# EAGLE board SRC01 (EAGLE 7.6.0)
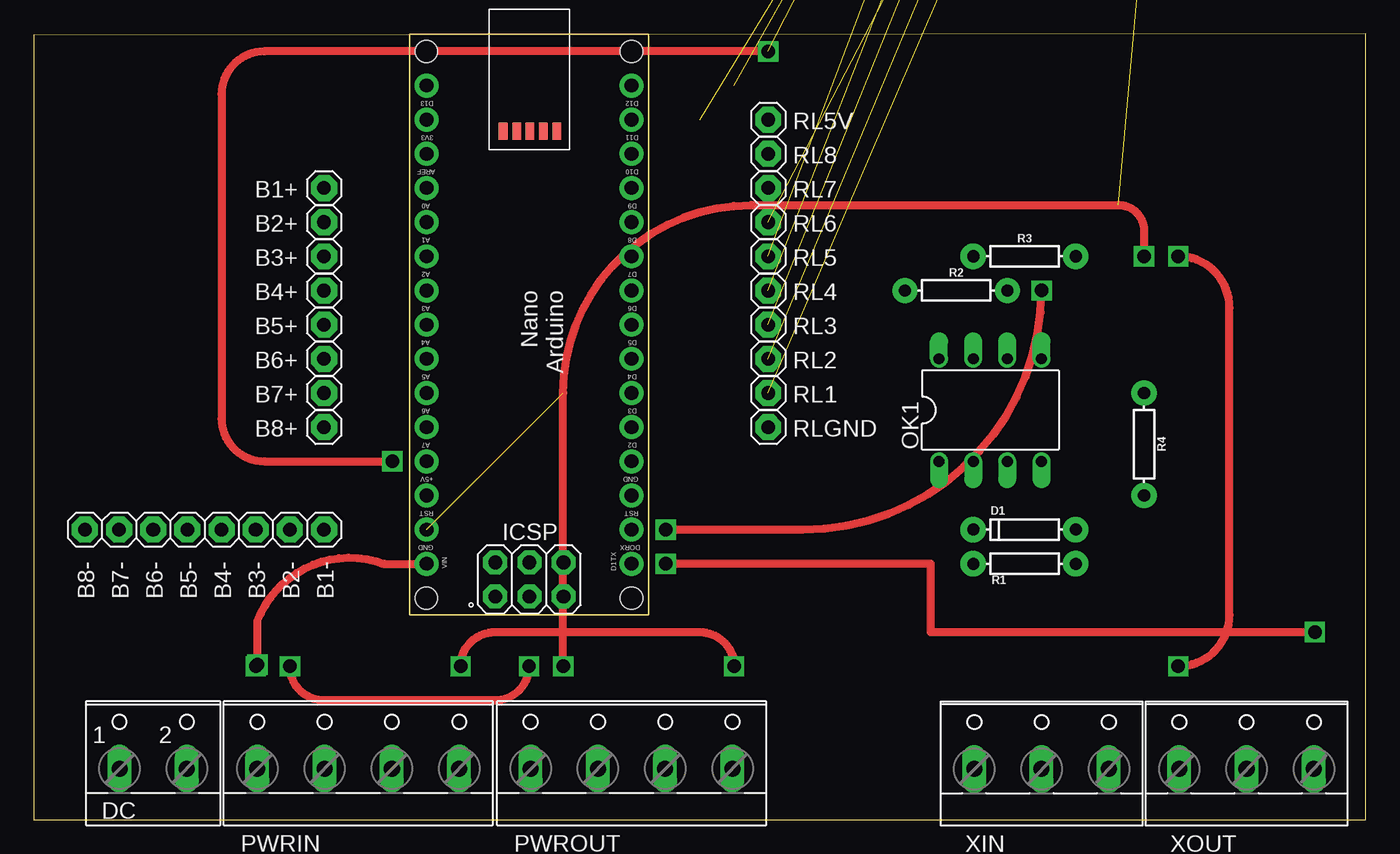
[diagram p0: board, top side]
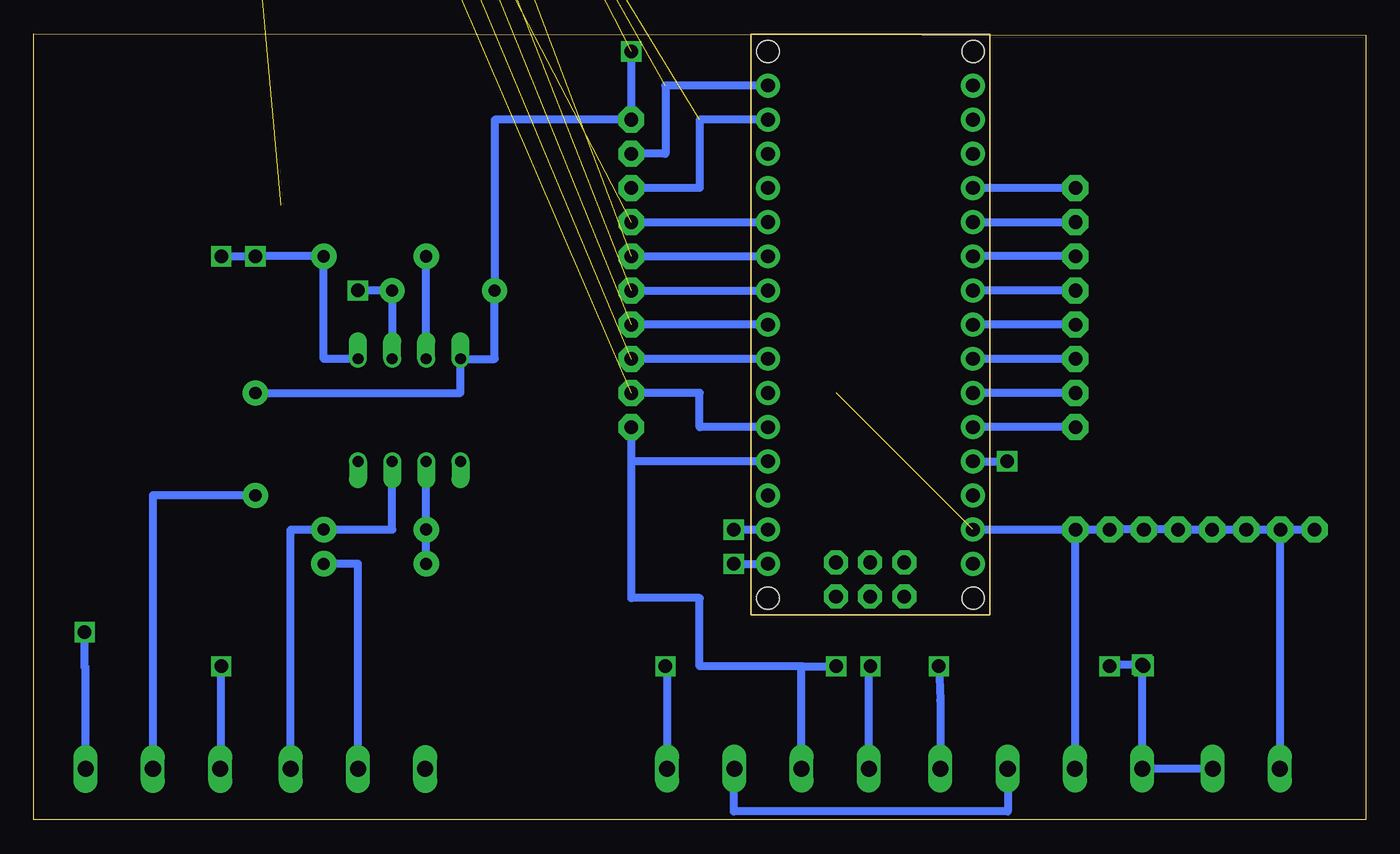
[diagram p1: board, bottom side, seen from below]

Size 99.04 x 58.47 mm. Coordinates in mm from the lower left corner, seen from the top.
Outline: 0,0 99.04,0 99.04,58.47 0,58.34 0,0
Copper layers (1*16): Top 0.035mm / dielectric 1.5mm / Bottom 0.035mm
Design rules "default": minimum track width 10mil, minimum drill 24mil, track to track 8mil, track to pad 8mil, pad to pad 8mil, via to via 8mil, smd to smd 8mil, copper to edge 40mil, drill to drill 8mil, minimum pad ring 10mil, minimum via ring 8mil, stop-mask expansion 4mil, vias tented up to drill 0mil, thermal gap 10mil
Net classes: 0 default: width 0.508 mm, drill 0.508 mm, clearance 0.406 mm; 1 GND: width 1.016 mm, drill 0.508 mm, clearance 0.508 mm; 2 5VM: width 1.016 mm, drill 0.508 mm, clearance 0.508 mm; 3 12VL: width 0.61 mm, drill 0.508 mm, clearance 0.508 mm; 4 12VA: width 0.508 mm, drill 0.508 mm, clearance 0.508 mm; 5 AR5V: width 0.406 mm, drill 0.508 mm, clearance 0.508 mm; 6 PTX: width 0.406 mm, drill 0.508 mm, clearance 0.508 mm; 7 PRX: width 0.406 mm, drill 0.508 mm, clearance 0.508 mm
Holes 3 mm at 118.11,16.51 118.11,24.13

## Footprints (pad centres in the part's own frame; a part is rotated, then mirrored left to right if it is on the bottom)
1X01 = drill 1.016 pad 1.93 octagon: 1 0,0
DIODE-1N4148 = drill 0.9 pad 1.88: A -3.81,0; C 3.81,0
W237-102 = drill 1.194 long: 1 -2.5,-1.27; 2 2.5,-1.27
DIL08 = drill 0.813 offset: 1 -3.81,-3.81; 2 -1.27,-3.81; 3 1.27,-3.81; 4 3.81,-3.81; 5 3.81,3.81; 6 1.27,3.81; 7 -1.27,3.81; 8 -3.81,3.81
ARDUINO_NANO = drill 1.016 pad 1.778: 3V3 6.35,1.27; 5V 31.75,1.27; A0 11.43,1.27; A1 13.97,1.27; A2 16.51,1.27; A3 19.05,1.27; A4 21.59,1.27; A5 24.13,1.27; A6 26.67,1.27; A7 29.21,1.27; D2 29.21,16.51; D3 26.67,16.51; D4 24.13,16.51; D5 21.59,16.51; D6 19.05,16.51; D7 16.51,16.51; D8 13.97,16.51; D9 11.43,16.51; D10 8.89,16.51; D11 6.35,16.51; D12 3.81,16.51; D13 3.81,1.27; GND 31.75,16.51; GND. 36.83,1.27; REF 8.89,1.27; RST 34.29,16.51; RST. 34.29,1.27; RX1 36.83,16.51; TX1 39.37,16.51; VIN 39.37,1.27 | drill 1.016 pad 1.778 octagon: 5V. 39.268,6.375; GND_ 39.268,11.455; MISO 41.808,6.375; MOSI 39.268,8.915; RESET.. 41.808,11.455; SCK 41.808,8.915 | smd 1.27 x 0.635: <USB>+V 7.214,10.947; <USB>D+ 7.214,9.957; <USB>D- 7.214,8.941; <USB>GND 7.214,6.96; <USB>ID 7.214,7.976 | hole 1.651: 1.27,1.27; 1.27,16.51; 41.91,16.51; 41.91,1.27
W237-4 = drill 1.194 long: 1 -7.5,-1.27; 2 -2.5,-1.27; 3 2.5,-1.27; 4 7.5,-1.27
AXIAL-0.3 = drill 0.9 pad 1.88: P$1 -3.81,0; P$2 3.81,0
HDF15V = drill 0.9 octagon: 1 4.329,1.98 | drill 0.9: 2 2.043,1.98; 3 -0.243,1.98; 4 -2.529,1.98; 5 -4.815,1.98; 6 5.472,0; 7 3.186,0; 8 0.9,0; 9 -1.386,0; 10 -3.672,0; 11 4.329,-1.98; 12 2.043,-1.98; 13 -0.243,-1.98; 14 -2.529,-1.98; 15 -4.815,-1.98 | hole 3: -12.5,0; 12.5,0
W237-103 = drill 1.194 long: 1 -5,-1.29; 2 0,-1.29; 3 5,-1.29

## Placement (x,y rotation side)
B1+  [1X01]  21.59,46.99 0 top
B1-  [1X01]  21.59,21.59 0 top
B2+  [1X01]  21.59,44.45 0 top
B2-  [1X01]  19.05,21.59 0 top
B3+  [1X01]  21.59,41.91 0 top
B3-  [1X01]  16.51,21.59 0 top
B4+  [1X01]  21.59,39.37 0 top
B4-  [1X01]  13.97,21.59 0 top
B5+  [1X01]  21.59,36.83 0 top
B5-  [1X01]  11.43,21.59 0 top
B6+  [1X01]  21.59,34.29 0 top
B6-  [1X01]  8.89,21.59 0 top
B7+  [1X01]  21.59,31.75 0 top
B7-  [1X01]  6.35,21.59 0 top
B8+  [1X01]  21.59,29.21 0 top
B8-  [1X01]  3.81,21.59 0 top
D1  200mA/100V/1V  [DIODE-1N4148]  73.66,21.59 180 top
DC  [W237-102]  8.89,5.08 0 top
OK1  6N138  [DIL08]  71.12,30.48 0 top
PCB1  ARDUINO_NANO  [ARDUINO_NANO]  27.94,58.42 270 top
PWRIN  [W237-4]  24.13,5.08 0 top
PWROUT  [W237-4]  44.45,5.08 0 top
R1  220  [AXIAL-0.3]  73.66,19.05 0 top
R2  220  [AXIAL-0.3]  68.58,39.37 0 top
R3  4K7  [AXIAL-0.3]  73.66,41.91 0 top
R4  220  [AXIAL-0.3]  82.55,27.94 270 top
RL1  [1X01]  54.61,31.75 0 top
RL2  [1X01]  54.61,34.29 0 top
RL3  [1X01]  54.61,36.83 0 top
RL4  [1X01]  54.61,39.37 0 top
RL5  [1X01]  54.61,41.91 0 top
RL5V  [1X01]  54.61,52.07 0 top
RL6  [1X01]  54.61,44.45 0 top
RL7  [1X01]  54.61,46.99 0 top
RL8  [1X01]  54.61,49.53 0 top
RLGND  [1X01]  54.61,29.21 0 top
X1  [HDF15V]  92.71,128.27 0 top  (outside the outline)
XIN  [W237-103]  74.93,5.08 0 top
XOUT  [W237-103]  90.17,5.08 0 top

## Library data of the parts
B1+ B1- B2+ B2- B3+ B3- B4+ B4- B5+ B5- B6+ B6- B7+ B7- B8+ B8- RL1-RL5 RL5V RL6-RL8 RLGND X1 = adafruit
D1 = SparkFun-DiscreteSemi; PROD_ID: DIO-08378
DC = con-wago-500; MPN: 237-102; OC_FARNELL: unknown; OC_NEWARK: 70K9898
OK1 = optocoupler; MF: VISHAY/TELEFUNKEN; MPN: 6N138; OC_FARNELL: 9860150; OC_NEWARK: 35K5294
PCB1 = E14_Arduino_revC
PWRIN PWROUT = con-wago-500; OC_FARNELL: unknown; OC_NEWARK: unknown
R1-R4 = SparkFun-Resistors; PROD_ID: RES-08380
XIN XOUT = con-wago-500; MPN: 237-103; OC_FARNELL: unknown; OC_NEWARK: 18M7116

## Nets
5VM [5VM]: PWRIN.4 PWROUT.4
12VA [12VA]: DC.2 PCB1.VIN PWRIN.1 PWROUT.1
12VL [12VL]: PWRIN.3 PWROUT.3
AR5V: OK1.8 PCB1.5V R2.P$1 R4.P$1 RL5V.1 X1.14
B1: B1+.1 PCB1.A0
B2: B2+.1 PCB1.A1
B3: B3+.1 PCB1.A2
B4: B4+.1 PCB1.A3
B5: B5+.1 PCB1.A4
B6: B6+.1 PCB1.A5
B7: B7+.1 PCB1.A6
B8: B8+.1 PCB1.A7
D1: PCB1.D2 RL1.1 X1.1
D2: PCB1.D4 RL2.1 X1.2
D3: PCB1.D5 RL3.1 X1.3
D4: PCB1.D6 RL4.1 X1.4
D5: PCB1.D7 RL5.1 X1.5
D6: PCB1.D8 RL6.1 X1.6
D7: PCB1.D11 RL7.1 X1.7
D8: PCB1.D12 RL8.1 X1.8
GND [GND]: B1-.1 B2-.1 B3-.1 B4-.1 B5-.1 B6-.1 B7-.1 B8-.1 DC.1 OK1.5 PCB1.GND PCB1.GND. PWRIN.2 PWROUT.2 R3.P$2 RLGND.1 X1.15 XOUT.1
N$2: R4.P$2 XOUT.2
N$25: D1.A OK1.3 XIN.3
N$26: D1.C OK1.2 R1.P$1
N$27: R1.P$2 XIN.2
N$29: OK1.7 R3.P$1
PRX: OK1.6 PCB1.RX1 R2.P$2
PTX: PCB1.TX1 XOUT.3

## Tracks (layer width: path | path; a pad name or v marks a point on that pad's centre or on a via)
5VM  (via drill 1)
  Top 0.61: v31.75,11.43 arc-90 34.29,13.97 49.53,13.97 arc-90 v52.07,11.43
  Bottom 0.61: 31.75,3.81 PWRIN.4 31.63,8.89 v31.75,11.43 | v52.07,11.43 51.95,11.43 PWROUT.4
12VA  (via drill 1)
  Top 0.61: PCB1.VIN 26.04,19.05 arc90 16.63,14.72 v16.63,11.55 arc-90 v16.51,11.43 | 36.95,11.55 arc-90 v36.83,11.43 arc-90 34.29,8.89 21.59,8.89 arc-90 v19.05,11.43
  Bottom 0.61: DC.2 PWRIN.1 16.63,11.31 arc90 v16.51,11.43 | PWROUT.1 36.95,11.31 arc90 v36.83,11.43 | v16.63,11.55 19.05,11.55 v19.05,11.43
12VL
  Bottom 0.61: PWRIN.3 26.63,0.64 46.99,0.64 46.99,3.81 PWROUT.3
AR5V  (via drill 1)  (1 unrouted)
  Top 0.61: v54.61,57.15 17.14,57.15 arc90 13.97,53.98 13.97,29.84 arc90 17.14,26.67 v26.67,26.67
  Bottom 0.61: PCB1.5V v26.67,26.67 | v54.61,57.15 RL5V.1 64.77,52.07 R2.P$1 64.77,34.29 OK1.8 67.31,31.75 R4.P$1
B1
  Bottom 0.61: B1+.1 PCB1.A0
B2
  Bottom 0.61: PCB1.A1 B2+.1
B3
  Bottom 0.61: B3+.1 PCB1.A2
B4
  Bottom 0.61: B4+.1 PCB1.A3
B5
  Bottom 0.61: B5+.1 PCB1.A4
B6
  Bottom 0.61: B6+.1 PCB1.A5
B7
  Bottom 0.61: B7+.1 PCB1.A6
B8
  Bottom 0.61: B8+.1 PCB1.A7
D1  (1 unrouted)
  Bottom 0.61: PCB1.D2 49.53,29.21 49.53,31.75 RL1.1
D2  (1 unrouted)
  Bottom 0.61: PCB1.D4 RL2.1
D3  (1 unrouted)
  Bottom 0.61: PCB1.D5 RL3.1
D4  (1 unrouted)
  Bottom 0.61: RL4.1 PCB1.D6
D5  (1 unrouted)
  Bottom 0.61: RL5.1 PCB1.D7
D6  (1 unrouted)
  Bottom 0.61: RL6.1 PCB1.D8
D7  (1 unrouted)
  Bottom 0.61: PCB1.D11 49.53,52.07 49.53,46.99 RL7.1
D8  (1 unrouted)
  Bottom 0.61: PCB1.D12 52.07,54.61 52.07,49.53 RL8.1
GND  (via drill 1)  (2 unrouted)
  Top 0.61: v39.37,11.43 39.37,31.75 arc-90 53.34,45.72 80.64,45.72 arc-90 82.55,43.81 v82.55,41.91 | v85.09,11.43 arc90 88.9,15.24 88.9,38.1 arc90 v85.09,41.91
  Bottom 0.61: PCB1.GND. B1-.1 | B1-.1 B2-.1 B3-.1 B4-.1 B5-.1 B6-.1 B7-.1 | B7-.1 B8-.1 | OK1.5 77.47,34.29 R3.P$2 v82.55,41.91 v85.09,41.91 | DC.1 6.35,3.81 B7-.1 | PCB1.GND 54.61,26.67 | PWRIN.2 21.59,3.81 B1-.1 | 41.95,11.39 arc90 41.91,11.43 v39.37,11.43 | 54.61,26.67 54.61,16.51 49.53,16.51 49.53,11.43 41.95,11.43 41.95,11.39 | 54.61,26.67 RLGND.1 | XOUT.1 85.09,3.79 v85.09,11.43 | PWROUT.2 41.95,11.39
N$2
  Bottom 0.61: R4.P$2 90.17,24.13 XOUT.2
N$25
  Bottom 0.61: OK1.3 72.39,21.59 D1.A 79.93,21.59 XIN.3
N$26
  Bottom 0.61: R1.P$1 D1.C OK1.2
N$27
  Bottom 0.61: XIN.2 74.93,19.05 R1.P$2
N$29
  Bottom 0.61: OK1.7 R3.P$1
PRX  (via drill 1)
  Top 0.61: v46.99,21.59 57.15,21.59 arc90 v74.93,39.37
  Bottom 0.61: OK1.6 R2.P$2 v74.93,39.37 | v46.99,21.59 PCB1.RX1
PTX  (via drill 1)
  Top 0.61: v46.99,19.05 66.67,19.05 66.67,13.97 v95.25,13.97
  Bottom 0.61: v46.99,19.05 PCB1.TX1 | XOUT.3 95.17,11.35 95.25,11.35 v95.25,13.97